# Altium PCB UTAT_data handling_v1.pc.PcbDoc (part 2 of 3)
Units mm, origin at the board's own origin, x right, y up, seen from the top; angles counter-clockwise.
Board outline 152.4 x 101.6 mm, 4 copper layers (Top Layer, +3V3, GND, Bottom Layer); 169 components, 207 nets, 755 pads, 446 vias.
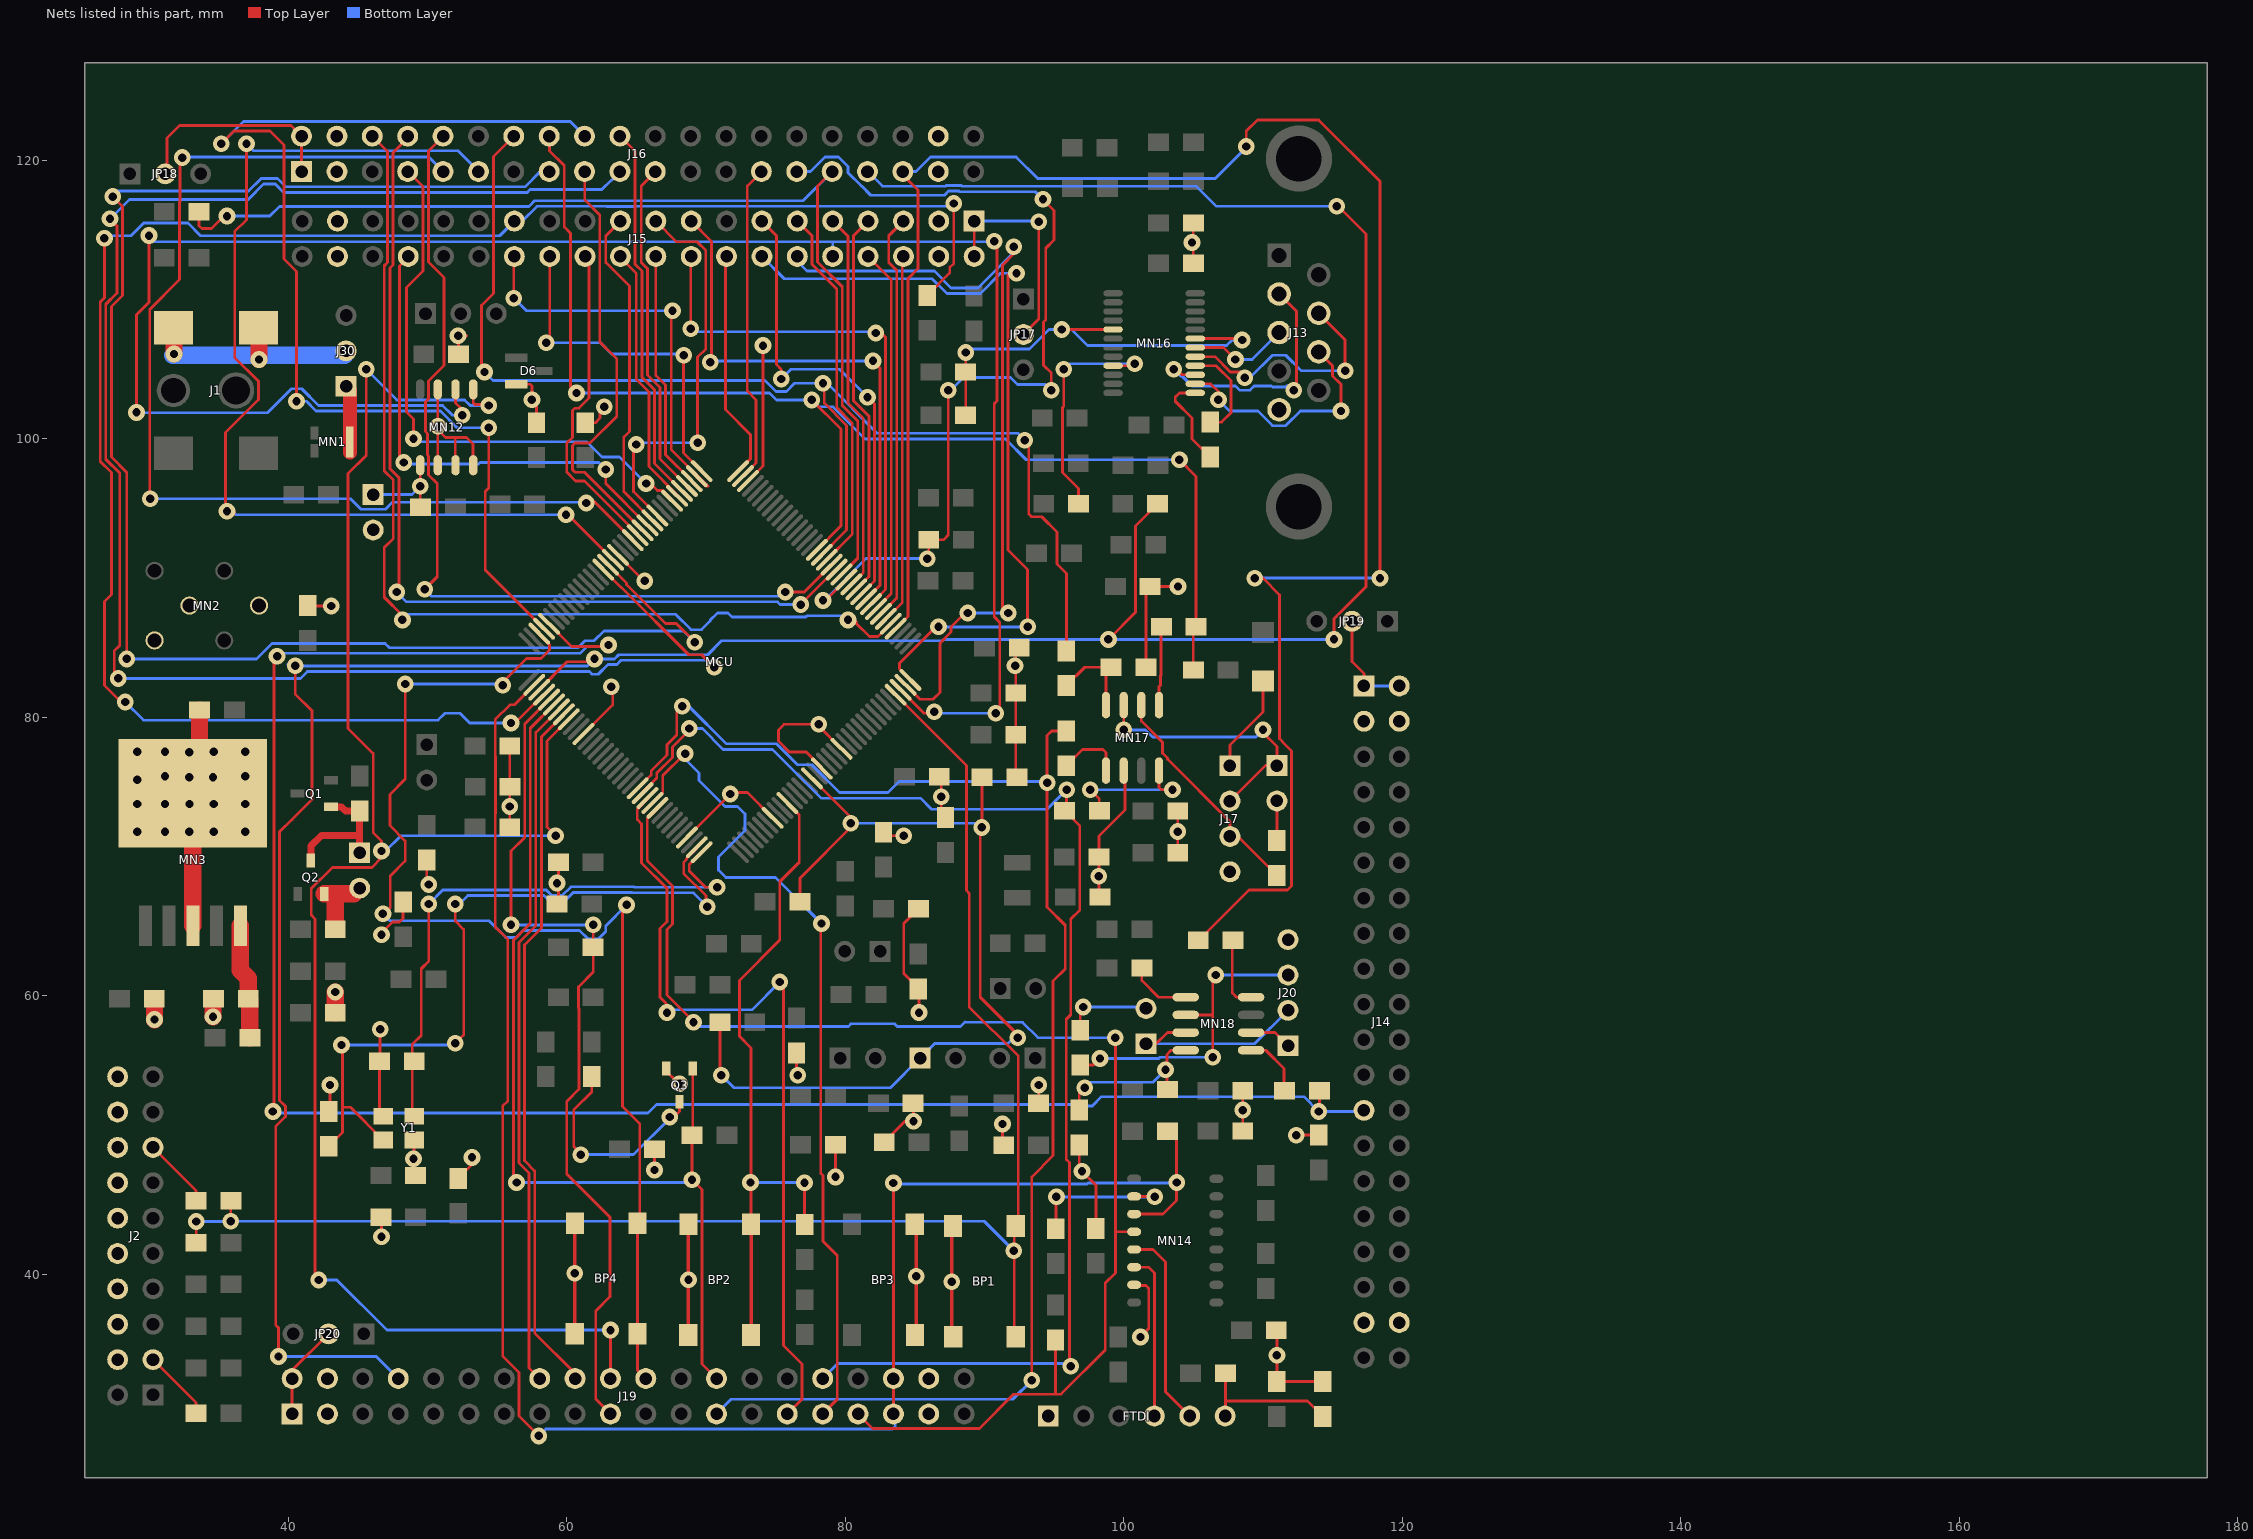
[diagram p4: the nets of this part, all layers, seen from the top]

## Via types
v1: diameter 1.2, hole 0.6, Top Layer to Bottom Layer, 446 vias

## Nets (pads, with @x,y where several pads share a name; then routed paths per layer and width w, separated by ;. In a path a pad name is that pad's centre, name@x,y a point inside that pad or via, vN(x,y) a via of type N, cw(c..) or ccw(c..) an arc to the next point about the centre after c; other vN are vias at no path point) (continued)
NetFTDI_4: FTDI.4 MN14.14 | length 11.9
  Top Layer w0.2: MN14.14@100.75,40.52 101.78,40.52 102.201,40.099 FTDI.4@102.201,29.83
NetFTDI_5: FTDI.5 MN14.13 | length 14.4
  Top Layer w0.2: MN14.13@100.75,41.79 102.11,41.79 103,40.9 103,31.571 FTDI.5@104.741,29.83
NetFTDI_6: FTDI.6 R205.1 R206.2 | length 10.5
  Top Layer w0.2: FTDI.6@107.281,29.83 107.3,29.849 107.3,30.9 ; R205.1@107.3,32.9 107.3,30.9 ; R206.2@114.3,29.8 113.2,30.9 107.3,30.9
NetJ1_1: J1.1 J30.2 | length 16.6
  Top Layer w1.25: J1.1@31.756,107.98 31.8,107.936 v1(31.8,106.1) ; J1.1@37.856,107.98 38,107.836 37.9,107.736 v1(37.9,105.7)
  Bottom Layer w1.25: v1@31.72,106.02 J30.2@44.056,106.02
NetJ13_2: J13.2 MN16.15 | length 18.7
  Top Layer w0.2: v1(103.6,105) 103.8,105 104.195,104.605 MN16.15@105.135,104.605 ; J13.2@111.16,110.405 112.4,109.165 112.4,103.7 v1(112.2,103.5)
  Bottom Layer w0.2: v1(103.6,105) 104.1,104.5 104.2,104.5 104.9,103.8 108.027,103.8 108.327,103.5 109.073,103.5 109.373,103.8 110.606,103.8 110.686,103.72 111.634,103.72 111.714,103.8 111.9,103.8 v1(112.2,103.5)
NetJ13_3: J13.3 MN16.18 | length 7.2
  Top Layer w0.2: MN16.18@105.135,106.555 107.165,106.555 v1(108.02,105.7)
  Bottom Layer w0.2: v1(108.02,105.7) 109.225,105.7 J13.3@111.16,107.635
NetJ13_7: J13.7 MN16.17 | length 17.5
  Top Layer w0.2: MN16.17@105.135,105.905 106.542,105.905 107.647,104.8 108.4,104.8 v1@108.6,104.6 ; J13.7@114,109.02 115.9,107.12 v1(115.9,104.9)
  Bottom Layer w0.2: v1(108.7,104.4) 109.076,104.4 110.686,106.01 111.634,106.01 112.744,104.9 v1(115.9,104.9) v1@116.2,104.9
NetJ13_8: J13.8 MN16.14 | length 18.2
  Top Layer w0.2: MN16.14@105.135,103.955 106.245,103.955 106.8,103.4 v1(106.8,102.8) ; J13.8@114,106.25 115,105.25 115,104.527 115.6,103.927 v1(115.6,102)
  Bottom Layer w0.2: v1(106.8,102.8) 107.6,102 109.636,102 110.686,100.95 111.634,100.95 112.684,102 v1(115.6,102) ; J13.8@114,105.5 J13.8@114,106.25
NetJ14_1: J14.1 J14.2 JP19.2 | length 7.5
  Top Layer w0.2: JP19.2@116.4,86.9 116.4,84 117.25,83.15 J14.1@117.25,82.26
  Bottom Layer w0.2: J14.1@117.25,82.26 J14.2@119.79,82.26
NetJ15_1: J15.1 J15.2 JP17.2 | length 15.8
  Top Layer w0.2: J15.2@89.26,113.1 J15.1@89.26,115.64 ; JP17.2@92.8,107.5 92.8,107.514 93.9,108.614 v1(93.9,115.6)
  Bottom Layer w0.2: J15.1@89.26,115.64 93.86,115.64 v1(93.9,115.6)
NetJ16_1: J16.1 J16.2 JP18.2 | length 15.9
  Top Layer w0.2: JP18.2@31.171,119.03 31.3,119.159 31.3,121.6 32.2,122.5 40.2,122.5 J16.2@40.96,121.74 J16.1@40.96,119.2
  Bottom Layer w0.2: J16.2@40.74,121.5 J16.2@40.98,121.74
NetJ17_2: J17.2 JP22.1 MN17.7 | length 19.9
  Top Layer w0.2: v1(99.996,79.104) MN17.7@99.996,80.88 ; J17.2@107.631,73.99 110.181,76.54 JP22.1@111,76.54 111,77.9 110,78.9 v1(110,79.104)
  Bottom Layer w0.2: v1(99.996,79.104) 100,79.1 101.573,79.1 102.073,78.6 109.496,78.6 v1(110,79.104) v1@110.296,79.104
NetJ17_3: J17.3 MN17.6 R128.2 | length 16.6
  Top Layer w0.2: MN17.6@101.266,80.88 101.266,79.734 102.785,78.215 102.785,77.43 103.136,77.079 103.136,77 107.631,72.505 J17.3@107.631,71.45 108.2,71.45 R128.2@111,68.65
NetJ19_1: J19.1 J19.2 JP20.2 | length 6.8
  Top Layer w0.2: J19.1@40.281,29.98 J19.2@40.281,32.52 40.281,33.12 JP20.2@42.891,35.73
NetJ20_2: J20.2 JP23.1 MN18.7 | length 14.4
  Top Layer w0.2: JP23.1@101.6,56.56 102.33,56.56 103.135,57.365 MN18.7@104.45,57.365
  Bottom Layer w0.2: JP23.1@101.6,56.56 109.4,56.56 J20.2@111.8,58.96
NetJ20_3: J20.3 MN18.6 R135.2 | length 22.9
  Top Layer w0.2: R135.2@96.881,55.03 97.83,55.03 v1(98.3,55.5) ; MN18.6@104.45,58.635 106.365,58.635 106.4,58.6 ; v1(106.4,55.6) 106.4,58.6 ; v1(106.6,61.5) 106.4,61.3 106.4,58.6
  Bottom Layer w0.2: v1(98.3,55.5) 102.527,55.5 102.627,55.6 v1(106.4,55.6) ; v1(106.6,61.5) J20.3@111.8,61.5
NetJ30_1: J30.1 MN1.1 | length 4.9
  Top Layer w1: J30.1@44.156,103.78 44.426,103.51 MN1.1@44.426,99.03
NetJP3_1: JP3.1 Q1.1 Q2.3 R4.1 | length 10
  Top Layer w0.5: Q2.3@41.631,69.73 41.631,70.78 42.381,71.53 45.131,71.53 ; Q1.1@43.081,73.58 43.831,73.58 44.131,73.28 R4.1@45.131,73.28 45.131,71.53 ; JP3.1@45.131,70.28 45.131,71.53
NetJP11_1: JP11.1 MN12.1 R83.1 | length 6.5
  Top Layer w0.2: MN12.1@49.476,98.105 v1(49.476,96.6) 49.476,95.435 R83.1@49.631,95.28
  Bottom Layer w0.2: JP11.1@46.1,96 48.876,96 v1(49.476,96.6)
NetJP22_2: JP22.2 R128.1 | length 2.8
  Top Layer w0.2: R128.1@111,71.15 JP22.2@111,74
NetJP23_2: JP23.2 R135.1 | length 5.9
  Top Layer w0.2: R135.1@96.881,57.53 96.881,58.881 v1@96.9,58.9
  Bottom Layer w0.2: v1(97.1,59.2) 101.5,59.2 JP23.2@101.6,59.1
NetMN3_5: MN3.5 R3.1 R6.2 | length 8.3
  Top Layer w1.25: MN3.5@36.56,65.03 36.56,61.851 37.131,61.28 R6.2@37.131,59.78 37.25,59.661 R3.1@37.25,57
NetMN14_10: MN14.10 R112.1 | length 10.9
  Top Layer w0.2: R112.1@95.131,43.28 95.131,45.531 v1(95.165,45.565) ; MN14.10@100.75,45.6 102.2,45.6 v1(102.235,45.565)
  Bottom Layer w0.2: v1(95.165,45.565) v1(102.235,45.565)
NetMN16_5: MN16.5 MN16.19 R119.2 RR7-4.2 | length 32.8
  Top Layer w0.2: R119.2@88.65,101.7 RR7-4.2@88.65,104.8 v1(88.65,106.2) ; v1(95.545,107.855) MN16.5@99.235,107.855 ; MN16.19@105.135,107.205 108.395,107.205 v1(108.5,107.1)
  Bottom Layer w0.2: v1(88.65,106.2) 88.9,106.45 93.235,106.45 94.64,107.855 v1(95.545,107.855) 96.252,107.855 97.407,106.7 107.393,106.7 107.793,107.1 v1(108.5,107.1)
NetMN16_9: MN16.9 RR7-1.2 | length 17.1
  Top Layer w0.2: v1(95.7,105) 95.7,102.349 95.6,102.249 95.6,97.589 96.757,96.432 RR7-1.2@96.757,95.33 ; MN16.9@99.235,105.255 100.655,105.255 v1(100.8,105.4)
  Bottom Layer w0.2: v1(95.7,105) 96.1,105.4 v1(100.8,105.4)
NetMN16_13: MN16.13 R124.2 | length 6.9
  Top Layer w0.2: MN16.13@105.135,103.305 104.005,103.305 103.7,103 103.7,102.7 104.9,101.5 104.9,100 R124.2@106.2,98.7
NetMN16_16: MN16.16 R124.1 | length 7.1
  Top Layer w0.2: MN16.16@105.135,105.255 106.627,105.255 107.7,104.182 107.7,101.873 107.027,101.2 R124.1@106.2,101.2
NetMN17_1: MN17.1 R127.2 | length 4.7
  Top Layer w0.2: R127.2@95.881,76.53 97.051,77.7 98.5,77.7 98.726,77.474 MN17.1@98.726,76.18
NetMN17_4: MN17.4 R130.2 | length 9.6
  Top Layer w0.2: v1@97.8,74.6 98.25,74.15 R130.2@98.25,73.3 ; MN17.4@102.536,76.18 102.536,74.964 102.7,74.8 v1(103.5,74.8)
  Bottom Layer w0.2: v1(97.6,74.8) v1(103.5,74.8)
NetMN17_5: MN17.5 R129.1 | length 6.1
  Top Layer w0.2: R129.1@102.381,86.78 102.681,86.48 102.681,83.031 102.65,83 102.65,82.314 102.536,82.2 MN17.5@102.536,80.88
NetMN17_8: MN17.8 R126.2 R131.2 | length 6.1
  Top Layer w0.2: R126.2@95.881,82.28 97.2,83.6 98.7,83.6 98.726,83.574 MN17.8@98.726,80.88
NetMN18_1: MN18.1 R133.2 | length 4.5
  Top Layer w0.2: MN18.1@109.15,56.095 110.2,56.095 111.5,54.795 111.5,53.25 R133.2@111.55,53.2
NetMN18_4: MN18.4 R137.2 | length 5.3
  Top Layer w0.2: R137.2@107.85,64 107.8,63.95 107.8,60.2 108.095,59.905 MN18.4@109.15,59.905
NetMN18_5: MN18.5 R136.1 | length 5
  Top Layer w0.2: R136.1@101.3,62.45 101.3,61.1 102.495,59.905 MN18.5@104.45,59.905
NetMN18_8: MN18.8 R134.2 R138.2 | length 13.6
  Top Layer w0.2: R138.2@96.8,51.8 96.8,53 v1(97.2,53.4) ; v1(103,54.7) v1@103.105,54.595 ; MN18.8@104.45,56.095 103.4,56.095 103.105,55.8 v1@103.105,54.595 ; v1@103.105,54.595 103.131,54.569 R134.2@103.131,53.28 103.105,53.306 v1@103.105,54.595
  Bottom Layer w0.2: v1(97.2,53.4) 97.6,53.8 102.1,53.8 102.8,54.5 v1@103.1,54.5
NetQ3_3: Q3.3 R13.1 | length 15.5
  Top Layer w0.2: v1(61,48.6) 61,48.7 60.5,49.2 60.5,51.8 61.8,53.1 R13.1@61.8,54.2 ; v1(67.4,51.3) 67.7,51.3 68.1,51.7 Q3.3@68.1,52.4
  Bottom Layer w0.2: v1(61,48.6) 64.8,48.6 67.4,51.2 v1(67.4,51.3)
NRST: BP1.3 BP1.4 MCU.69 R18.1 R24.1 | length 112.4
  Top Layer w0.2: R18.1@33.381,42.28 33.4,42.299 v1(33.4,43.8) ; v1(35.881,43.819) R24.1@35.881,45.28 ; MCU.69@83.622,81.631 88.7,76.553 88.7,67.573 88.9,67.373 88.9,59.206 92.431,55.675 92.431,43.656 BP1.4@92.25,43.475 ; v1(92.1,41.7) v1@92.144,41.7 ; BP1.3@92.144,35.495 v1@92.144,41.7 ; BP1.4@92.144,43.445 v1@92.144,41.7
  Bottom Layer w0.2: v1(33.4,43.8) 35.862,43.8 v1(35.881,43.819) 89.981,43.819 v1(92.1,41.7)
NRSTB: BP2.3 BP2.4 C22.2 MCU.47 | length 47.6
  Top Layer w0.2: BP2.4@73.259,43.58 BP2.4@73.244,43.595 73.244,56.256 72.4,57.1 72.4,61.101 75.3,64.001 75.3,68.199 76.7,69.599 76.7,72.997 MCU.47@75.844,73.853 ; C22.2@77.081,43.58 v1(77.081,46.581)
  Top Layer w0.25: BP2.3@73.244,35.645 BP2.4@73.244,43.595
  Bottom Layer w0.2: v1(73.2,46.6) 77.062,46.6 v1(77.081,46.581)
NSRST: J2.15 R24.2 | length 5.1
  Top Layer w0.2: J2.15@30.29,49.12 33.381,46.029 R24.2@33.381,45.28
NTRST: J2.3 R22.1 | length 5.1
  Top Layer w0.2: J2.3@30.29,33.88 33.381,30.789 R22.1@33.381,30.03
P1: C36.1 MCU.36 Y1.1 | length 41.6
  Top Layer w0.2: Y1.1@49.034,51.353 48.9,51.487 48.9,56.5 49.55,57.15 49.55,61.949 50.1,62.499 v1(50.1,66.6) ; MCU.36@69.692,70.317 68.8,69.426 68.8,68.962 69.962,67.8 v1(70.8,67.8)
  Bottom Layer w0.2: v1(50.1,66.6) 51.1,67.6 58.527,67.6 58.927,67.2 59.673,67.2 60.305,67.832 64.838,67.832 64.871,67.8 v1(70.8,67.8)
P2: C33.1 MCU.35 Y1.3 | length 54.9
  Top Layer w0.2: C33.1@42.9,49.2 43.9,50.2 43.9,52 ; v1(43.825,56.475) 43.9,56.4 43.9,52 ; Y1.3@46.834,49.653 46.81,49.653 44.463,52 43.9,52 ; v1(52,56.6) 52.6,57.2 52.6,64.773 52,65.373 v1(52,66.6) ; MCU.35@69.338,70.671 69.338,70.6 68.605,69.867 68.605,69.797 68.4,69.591 68.4,68.796 70,67.196 70,66.5 v1(70.1,66.4)
  Bottom Layer w0.2: v1(43.825,56.475) v1@52,56.475 ; v1(52,66.6) 52.3,66.6 52.9,67.2 58.362,67.2 58.762,66.8 59.838,66.8 60.471,67.432 64.673,67.432 64.705,67.4 69.1,67.4 v1(70.1,66.4)
P7: BP1.1 BP1.2 BP2.1 BP2.2 BP3.1 BP3.2 BP4.1 BP4.2 C2.2 C3.2 C4.2 C5.2 C7.2 C8.2 C9.2 C10.2 C11.2 C12.2 C13.2 C14.2 C15.2 C16.2 C17.2 C18.2 C19.2 C25.2 C26.2 C27.2 C28.2 C29.2 C33.2 C34.2 C35.2 C36.2 C37.2 C38.2 C40.2 C41.2 C42.2 C43.2 C45.2 C47.2 C48.2 C100.2 C119.2 C121.2 C124.2 C125.2 C126.2 C132.2 C133.2 C134.2 C135.2 C200.1 D6.2 FTDI.1 J2.4 J2.6 J2.8 J2.10 J2.12 J2.14 J2.16 J2.18 J2.20 J13.5 J14.3 J14.4 J14.37 J14.38 J15.3 J15.4 J15.37 J15.38 J16.3 J16.4 J16.37 J16.38 J17.1 J17.4 J19.3 J19.4 J19.37 J19.38 J20.1 J20.4 JP3.2 JP11.2 MCU.12 MCU.33 MCU.44 MCU.54 MCU.58 MCU.106 MCU.126 MN2.4 MN2.5 MN2.6 MN3.3 MN3.6 MN12.2 MN12.3 MN12.4 MN12.7 MN14.15 MN17.2 MN18.2 Q2.2 Q3.2 R5.1 R6.1 R28.1 R29.1 R131.1 R138.1 R204.1 R206.1 Y1.2 Y1.4 | length 236.8
  Top Layer w0.2: C2.2@41.406,88.03 41.436,88 v1(43.1,88) ; C33.2@42.9,51.7 43,51.8 v1(43,53.6) ; v1(46.6,57.6) 46.6,55.35 C36.2@46.55,55.3 46.55,51.637 Y1.2@46.834,51.353 ; R28.1@46.65,44.1 46.7,44.05 v1(46.7,42.7) ; v1(46.7,64.4) 46.7,64.499 47.501,65.3 48,65.3 48.25,65.55 C19.2@48.25,66.75 ; Y1.4@49.034,49.653 49.034,47.216 C8.2@49.15,47.1 ; C17.2@49.95,69.75 49.95,68.15 v1(50.1,68) ; MN12.2@50.746,98.105 MN12.7@50.746,103.555 ; v1(50.755,100.9) 50.755,100.646 51.301,100.1 52,100.1 ; MN12.3@52.001,98.055 52.001,99.4 52,99.401 52,100.1 ; v1(52.2,107.4) 52.8,107.4 52.231,106.831 C100.2@52.231,106.08 ; C26.2@52.209,46.888 53.2,47.879 v1(53.2,48.4) ; MN12.4@53.271,98.055 53.271,99.629 52.8,100.1 52,100.1 ; C29.2@55.913,72.105 C27.2@55.913,77.947 ; D6.2@56.381,103.93 57.37,103.93 57.5,103.8 v1(57.5,102.811) 57.831,102.48 C16.2@57.831,101.155 C16.2@57.986,101 ; C41.2@59.4,69.6 59.4,66.65 C25.2@59.45,66.6 ; C47.2@61.176,101 C47.2@61.331,101.155 62.055,101.155 62.4,101.5 62.4,102.3 v1(62.7,102.3) ; MCU.12@61.207,78.803 63.3,80.896 63.3,82.1 v1(63.2,82.2) ; MCU.126@63.681,91.672 65.554,89.8 v1(65.6,89.8) ; v1(66.3,47.5) C48.2@66.3,49 ; Q3.2@67.15,54.8 67.2,54.75 67.1,54.65 v1@67.9,53.85 ; v1@67.9,53.85 68.049,53.7 v1(68.1,53.7) ; MCU.33@68.631,71.378 v1(71.753,74.5) 71.753,74.447 71.906,74.6 72.975,74.6 MCU.44@74.783,72.792 ; MCU.106@73.015,96.975 74.1,98.06 74.1,99.327 v1(74.1,106.7) ; C4.2@76.5,55.9 76.5,54.4 v1(76.6,54.3) ; MCU.54@78.319,76.328 78.248,76.328 78.248,76.469 77.199,77.518 75.982,77.518 75.2,78.3 75.2,79.1 75.6,79.5 v1(78.1,79.5) 78.1,79.375 MCU.58@79.733,77.742 ; v1(79.3,47) C7.2@79.3,49.3 ; C18.2@82.7,71.8 C18.2@82.75,71.75 83,71.5 v1(84.2,71.5) ; C5.2@82.9,49.4 C5.2@82.8,49.5 84.3,51 v1(84.9,51) 84.9,52.261 C12.2@84.881,52.28 ; C15.2@85.25,66.25 84.2,65.2 84.2,61.6 85.25,60.55 C9.2@85.25,60.5 85.3,60.45 v1(85.3,58.8) ; C38.2@86.75,75.75 86.891,75.609 C43.2@86.891,72.644 ; v1(91.3,50.8) 91.3,49.361 C3.2@91.381,49.28 ; C34.2@92.25,85 C35.2@92.25,81.75 C37.2@92.25,78.75 92.25,75.382 C45.2@92.332,75.3 ; C14.2@93.881,52.28 93.9,52.299 v1(93.9,53.6) ; R138.1@96.8,49.3 96.8,47.6 v1(97,47.4) 98,46.4 C121.2@98,43.3 ; C40.2@98.3,67.1 98.231,67.169 C42.2@98.231,69.972 98.231,71.482 100.1,73.351 100.1,76.076 MN17.2@99.996,76.18 ; MN14.15@100.75,39.25 100.8,39.2 101.6,39.2 101.801,38.999 101.801,36.101 v1(101.2,35.5) ; R131.1@101.6,83.6 101.6,89.1 R29.1@101.9,89.4 v1(103.9,89.4) ; C133.2@103.881,70.28 C132.2@103.881,73.28 ; C125.2@105,112.6 C126.2@105,115.5 ; J17.1@107.631,76.53 107.631,78.008 110,80.377 C200.1@110,82.6 ; C135.2@108.55,50.3 C134.2@108.55,53.2 ; MN18.2@109.15,57.365 110.855,57.365 J20.1@111.8,56.42 ; C119.2@110.95,36 111,35.95 v1(111,34.2) R204.1@111,32.3 R206.1@114.3,32.3 ; v1(112.4,50) C124.2@114,50
  Top Layer w0.25: BP4.1@60.581,35.73 BP4.2@60.581,43.68 ; BP2.1@68.744,35.645 v1(68.744,39.62) BP2.2@68.744,43.595 ; BP3.2@85.098,35.27 BP3.1@85.098,43.22 ; BP1.1@87.644,35.495 v1(87.644,39.47) BP1.2@87.644,43.445
  Top Layer w1.25: C11.2@30.381,59.78 30.4,59.761 v1(30.4,58.3) ; MN3.3@33.156,65.03 MN3.6@33.156,73.78 ; MN3.6@33.156,74.555 33.631,75.03 R5.1@33.631,80.53 ; v1(34.6,58.5) 34.6,59.749 R6.1@34.631,59.78 ; Q2.2@42.581,67.33 43.381,67.33 ; C10.2@43.381,58.78 v1(43.381,60.28) ; C13.2@43.381,64.78 43.381,67.33 ; JP3.2@45.131,67.74 44.721,67.33 43.381,67.33
  other v1: 85.098,39.87 60.581,40.08 49,48.3 108.55,51.8 59.3,68.1 98.2,68.6 29.156,71.78 31.156,71.78 34.656,71.78 36.906,71.78 32.9,71.8 103.881,71.8 55.9,73.6 29.156,73.78 31.156,73.78 32.906,73.78 34.656,73.78 36.906,73.78 86.891,74.3 29.156,75.53 32.9,75.7 34.6,75.7 31.156,75.78 36.906,75.78 32.9,77.5 29.156,77.53 31.156,77.53 34.656,77.53 36.906,77.53 92.2,83.7 104.9,114.1
P8: C45.1 JP1-4.1 MCU.52 R139.1 R140.1 | length 67.5
  Top Layer w0.2: R140.1@71,58.1 71,54.4 v1(71.1,54.3) ; R139.1@76.75,66.75 76.75,68.45 80.6,72.3 80.6,72.632 MCU.52@77.611,75.621 ; v1(89.8,72.1) 89.7,72 89.7,59.9 v1@92.1,57.5 ; v1@89.832,72.1 C45.1@89.832,75.692
  Bottom Layer w0.2: v1(71.1,54.3) 72,53.4 83.251,53.4 JP1-4.1@85.381,55.53 86.431,56.58 91.68,56.58 92.1,57 v1(92.4,57) ; v1(80.4,72.4) 89.5,72.4 v1(89.8,72.1)
PA0: J19.25 MCU.23 R127.1 | length 109.5
  Top Layer w0.2: MCU.23@65.096,74.914 65.118,74.914 66.065,75.861 66.065,76.161 67.2,77.296 67.2,78.038 67.9,78.738 67.9,80.4 v1(68.3,80.8) ; v1(93.4,32.4) 93.4,47 94.931,48.531 94.931,61.058 95.8,61.927 95.8,65.073 94.5,66.373 94.5,78.7 94.83,79.03 R127.1@95.881,79.03
  Bottom Layer w0.2: v1(68.3,80.8) 68.766,80.8 71.466,78.1 74.048,78.1 75.08,78.1 76.58,76.6 77.6,76.6 79.6,74.6 83.073,74.6 83.873,75.4 v1@94.7,75.4 ; J19.25@70.761,29.98 71.811,31.03 92.03,31.03 v1(93.4,32.4)
  other v1: 94.5,75.3
PA1: J19.32 MCU.24 R130.1 | length 96.9
  Top Layer w0.2: MCU.24@65.449,74.56 65.52,74.56 65.52,74.702 66.465,75.647 66.465,75.995 67.6,77.13 67.6,77.873 68.927,79.2 v1(68.8,79.2) ; v1(95.9,74.8) 95.9,73.45 R130.1@95.75,73.3 96.85,72.2 96.85,66.175 96.2,65.525 96.2,58.648 95.875,58.323 95.875,48.25 96.1,48.025 v1@96.1,33.4
  Bottom Layer w0.2: v1(68.8,79.2) 69.738,79.2 71.2,77.738 71.2,77.73 71.23,77.7 74.773,77.7 78.273,74.2 85.4,74.2 86.2,73.4 94.5,73.4 v1(95.9,74.8) ; J19.32@78.381,32.52 79.461,33.6 v1@96.1,33.6
  other v1: 96.2,33.4
PA2: J15.9 MCU.85 | length 27.4
  Top Layer w0.2: J15.9@79.1,115.64 80.19,114.55 80.19,102.572 81.3,101.462 81.3,90.411 MCU.85@80.44,89.551
PA3: J15.7 MCU.84 | length 27.7
  Top Layer w0.2: MCU.84@80.793,89.197 81.7,90.104 81.7,101.627 80.59,102.737 80.59,114.59 J15.7@81.64,115.64
PA4: J15.13 MCU.83 | length 34
  Top Layer w0.2: J15.13@74.02,115.64 75.07,114.59 75.07,105.334 75.4,105.004 v1(75.4,104.3) ; MCU.83@81.147,88.844 82.1,89.797 82.1,102.5 v1(81.6,103)
  Bottom Layer w0.2: v1(75.4,104.3) 76.1,105 79.6,105 v1(81.6,103)
PA5: J19.29 MCU.25 | length 58.6
  Top Layer w0.2: MCU.25@65.803,74.207 65.803,74.136 65.07,73.403 65.07,72.662 65.377,72.355 65.377,69.556 67.2,67.734 67.2,65.331 66.7,64.831 66.7,59.9 67.6,59 67.4,58.8 v1(67.2,58.8) ; v1(75.3,61) 75.575,60.725 75.575,34.886 76.891,33.57 76.891,31.03 J19.29@75.841,29.98
  Bottom Layer w0.2: v1(67.2,58.8) 67.3,58.8 67.5,59 73.3,59 v1(75.3,61)
PA6: J15.17 MCU.82 | length 40.3
  Top Layer w0.2: J15.17@68.94,115.64 70.4,114.18 70.4,105.6 v1(70.3,105.5) ; MCU.82@81.501,88.49 82.5,89.49 82.5,105.1 v1(82,105.6)
  Bottom Layer w0.2: v1(70.3,105.5) 70.4,105.6 v1(82,105.6)
PA7: J19.31 MCU.26 | length 61.3
  Top Layer w0.2: MCU.26@66.156,73.853 66.889,74.586 66.889,75.811 68.378,77.3 v1@68.4,77.3 ; v1(78.3,65.2) 78.25,65.15 78.25,47.25 78.4,47.1 78.4,46.627 78.406,46.621 78.406,42.384 79.431,41.359 79.431,31.03 J19.31@78.381,29.98
  Bottom Layer w0.2: v1(68.5,77.4) 68.5,77 69.5,76 69.5,75.48 71.38,73.6 72.273,73.6 72.8,73.073 72.8,71.873 70.9,69.973 70.9,69.027 71.427,68.5 72.173,68.5 75,68.5 78.1,65.4 v1@78.7,65.4
PA8: J19.33 MCU.27 MN14.12 R200.1 | length 97.1
  Top Layer w0.2: MCU.27@66.51,73.499 66.51,73.429 65.777,72.696 65.777,69.722 67.6,67.899 67.6,65.165 67.2,64.765 67.2,64 67.2,60.073 69.1,58.173 v1(69.1,58.1) ; J19.33@80.921,29.98 81.971,28.93 89.63,28.93 92.1,31.4 95.1,31.4 ; R200.1@95.1,35.3 95.1,31.4 ; v1(99.4,57) 99.4,43.06 ; MN14.12@100.75,43.06 99.4,43.06 ; 95.1,31.4 95.5,31.4 98.675,34.575 98.675,39.375 99.4,40.1 99.4,43.06
  Bottom Layer w0.2: v1(69.1,58.1) 69.4,57.8 80.227,57.8 80.427,58 83.533,58 83.733,57.8 88.273,57.8 88.6,58.127 88.627,58.1 92.734,58.1 93.834,57 v1(99.4,57)
PA9: J19.35 J19.36 MCU.2 MN14.11 R111.1 | length 129.4
  Top Layer w0.2: MCU.2@57.671,82.338 56.233,80.9 55.927,80.9 54.863,79.836 54.863,77.198 54.883,77.178 54.883,73.12 54.863,73.1 54.863,64.964 55.771,64.056 55.771,52.462 55.4,52.091 55.4,34.126 56.571,32.955 56.571,29.829 v1(58,28.4) ; J19.35@83.461,29.98 J19.36@83.461,32.52 v1(83.461,46.561) ; MN14.11@100.75,44.33 102.83,44.33 103.8,45.3 v1(103.8,46.6) 103.8,49.611 R111.1@103.131,50.28
  Bottom Layer w0.2: v1(58,28.4) 58.5,28.9 83.4,28.9 83.6,29.1 83.6,29.841 J19.35@83.461,29.98 ; v1(83.461,46.561) 83.522,46.5 97.373,46.5 97.434,46.561 103.761,46.561 v1(103.8,46.6)
PA10: J16.33 J19.8 MCU.3 R121.1 | length 219.9
  Top Layer w0.2: v1(39.301,34.101) 39.301,36.165 39.1,36.366 39.1,50.627 39.8,51.327 39.8,52.073 39.375,52.498 39.375,71.786 40.264,72.675 40.283,72.675 41.7,74.092 41.7,80.473 40.5,81.673 v1(40.5,83.7) ; MCU.3@58.025,81.985 60.04,84 v1@62,84 ; v1(98.9,85.6) 100.85,87.55 100.85,92.85 100.85,93.748 R121.1@102.432,95.33 ; v1(115.1,85.6) 115.1,87.085 117.4,89.385 117.4,114.72 v1@115.36,116.76
  Bottom Layer w0.2: v1(39.301,34.101) 46.32,34.101 J19.8@47.901,32.52 ; v1@39.973,83.8 v1@40.5,83.8 ; v1(40.5,83.7) 61.5,83.7 v1(62,84.2) ; 62.6,84.2 63.434,84.2 63.734,84.5 70.127,84.5 71.127,85.5 86.973,85.5 87.073,85.6 88.473,85.6 ; J16.33@81.62,119.2 82.67,118.15 87.212,118.15 87.261,118.2 88.338,118.2 88.388,118.15 105.2,118.15 106.65,116.7 v1(115.3,116.7) ; 88.473,85.6 v1(98.9,85.6) v1(115.1,85.6)
PA11: J15.27 MCU.4 R120.1 | length 136.6
  Top Layer w0.2: v1(26.8,114.4) 26.8,110.131 26.5,109.831 26.5,98.373 27.3,97.573 27.3,88.827 26.8,88.327 26.8,82.3 v1@28.1,81 ; v1(56,79.6) 56.3,79.6 58.331,81.631 MCU.4@58.378,81.631 ; R120.1@85.9,110.3 87.5,111.9 87.5,112.3 87.8,112.6 v1@87.8,116.9
  Bottom Layer w0.2: v1@26.89,114.59 28.717,114.59 29.627,115.5 32.8,115.5 33.71,114.59 55.19,114.59 J15.27@56.24,115.64 56.806,115.64 57.866,116.7 62.869,116.7 62.879,116.69 64.841,116.69 64.851,116.7 87.3,116.7 87.5,116.9 v1(87.8,116.9) ; v1(28.3,81.1) 29.6,79.8 50.762,79.8 51.262,80.3 52.338,80.3 53.039,79.6 v1(56,79.6)
PA12: J19.19 MCU.5 R10.1 | length 61.5
  Top Layer w0.2: v1(56,65.1) 56.007,65.107 56.007,70.4 56.983,71.376 56.983,79.529 MCU.5@58.732,81.278 ; v1(61.9,65.1) R10.1@61.9,63.5 61.9,61.699 60.85,60.649 60.85,59.126 60.875,59.101 60.875,53.301 60,52.426 60,47.2 63.1,44.1 63.1,38.4 62.091,37.391 62.091,31.03 J19.19@63.141,29.98
  Bottom Layer w0.2: v1(56,65.1) 61.6,65.1 61.8,64.9 61.9,65 v1(61.9,65.1)
PA13: J19.26 MCU.6 Q3.1 R14.1 | length 71.5
  Top Layer w0.2: v1(56.4,46.6) 56.4,46.9 56.171,47.129 56.171,63.998 57.383,65.21 57.383,79.222 MCU.6@59.085,80.924 ; Q3.1@69,54.8 69,54.85 Q3.1@69.05,54.8 69.05,50.05 R14.1@69,50 v1(69,46.8) 69.709,46.091 69.709,33.572 J19.26@70.761,32.52
  Bottom Layer w0.2: v1(56.4,46.6) 68.8,46.6 v1(69,46.8)
PA14: J19.16 MCU.7 | length 49.9
  Top Layer w0.2: J19.16@58.061,32.52 57.3,33.281 57.3,47.273 56.571,48.002 56.571,63.833 57.783,65.045 57.783,78.915 MCU.7@59.439,80.571
PA15: J19.18 MCU.8 | length 50.4
  Top Layer w0.2: MCU.8@59.792,80.217 58.183,78.608 58.183,64.879 56.971,63.667 56.971,48.167 57.7,47.438 57.7,35.8 60.601,32.899 J19.18@60.601,32.52
PA16: J15.6 MCU.78 | length 26.5
  Top Layer w0.2: MCU.78@82.915,87.076 84.1,88.261 84.1,113.02 J15.6@84.18,113.1
PA17: J19.20 MCU.9 MN12.5 | length 130.3
  Top Layer w0.2: v1@41.931,39.6 41.931,65.529 41.656,65.804 41.656,67.713 43.173,69.23 46.005,69.23 46.7,69.925 v1(46.7,70.4) 46.7,71.13 46.1,71.73 46.1,77.407 44.3,79.207 44.3,97.505 45.6,98.805 v1(45.6,105) ; MN12.5@53.286,103.555 53.286,102.587 53.4,102.473 54.327,102.473 v1(54.4,102.4) ; v1(59.2,71.5) 58.583,72.117 58.583,78.301 MCU.9@60.146,79.863 ; J19.20@63.141,32.52 v1(63.141,36)
  Bottom Layer w0.2: v1(42.2,39.6) 43.485,39.6 47.085,36 v1(63.141,36) ; 46.05,104.55 47.3,103.3 47.8,102.8 52.673,102.8 53.073,102.4 v1(54.4,102.4) ; v1(46.7,70.4) 47,70.4 48.1,71.5 v1(59.2,71.5)
PA18: J15.10 MCU.70 MN12.6 | length 143.7
  Top Layer w0.2: v1(29.1,101.9) 29.1,108.914 30,109.814 v1(30,114.6) ; MN12.6@52.016,103.555 52.016,102.584 52.5,102.1 v1(52.5,101.7) ; MCU.70@83.975,81.985 85.66,80.3 v1@86.2,80.3 ; v1(90.7,114.2) 90.7,114 90.9,113.8 90.9,102.727 90.7,102.527 90.7,87.227 91.1,86.827 91.1,80.6 v1(90.8,80.3)
  Bottom Layer w0.2: v1@29.1,101.88 38.507,101.88 40.227,103.6 40.973,103.6 42.173,102.4 51.093,102.4 51.793,101.7 v1(52.5,101.7) ; v1(30,114.6) 30.45,114.15 79.1,114.15 ; J15.10@79.1,113.1 79.1,114.15 ; v1(86.4,80.4) 86.5,80.3 v1(90.8,80.3) ; v1(90.7,114.2) 90.65,114.15 79.1,114.15
PA19: J15.12 MCU.71 | length 57.2
  Top Layer w0.2: MCU.71@84.329,82.338 85.367,81.3 86.3,81.3 86.8,81.8 86.8,85.327 87.6,86.127 87.6,86.5 88.6,87.5 v1(88.8,87.5) ; v1(91.7,87.5) 91.3,87.9 91.3,102.562 91.3,112.473 92.2,113.373 92.1,113.473 v1(92.1,113.8)
  Bottom Layer w0.2: J15.12@76.56,113.1 76.56,112.74 77.25,112.05 86.4,112.05 87.61,110.84 89.54,110.84 92,113.3 v1@92,113.4 ; v1(88.8,87.5) v1(91.7,87.5)
PA20: J15.14 MCU.72 | length 57.7
  Top Layer w0.2: MCU.72@84.683,82.692 83.9,83.474 83.9,83.889 v1@86.605,86.595 ; v1@91.75,111.85 91.7,111.8 91.7,92.024 93.1,90.624 v1(93.1,86.5)
  Bottom Layer w0.2: J15.14@74.02,113.1 75.62,111.5 86.24,111.5 87.3,110.44 89.706,110.44 91.166,111.9 v1(92.3,111.9) ; v1(86.7,86.5) v1(93.1,86.5)
PA21: J16.27 MCU.107 | length 22.9
  Top Layer w0.2: MCU.107@72.662,97.329 73.6,98.267 73.6,102.8 72.97,103.43 72.97,118.17 J16.27@74,119.2
PA22: J15.18 MCU.81 | length 39.3
  Top Layer w0.2: v1(68.9,107.9) 68.9,112.94 69,113.04 J15.18@68.94,113.1 ; MCU.81@81.854,88.137 82.9,89.182 82.9,107.3 82.6,107.6 v1(82.2,107.6)
  Bottom Layer w0.2: v1(68.9,107.9) 69.1,107.7 82.3,107.7 v1(82.2,107.6)
PA23: J15.8 MCU.80 | length 26.5
  Top Layer w0.2: J15.8@81.64,113.1 83.3,111.44 83.3,88.875 MCU.80@82.208,87.783
PA24: J15.5 MCU.79 | length 29.4
  Top Layer w0.2: MCU.79@82.561,87.429 83.7,88.568 83.7,112.095 83.13,112.665 83.13,114.59 J15.5@84.18,115.64
PA25: J15.16 MCU.108 | length 16.6
  Top Layer w0.2: J15.16@71.48,113.1 71.4,113.02 71.4,102.1 73.2,100.3 73.2,98.574 MCU.108@72.308,97.683
PA26: J15.26 MCU.109 | length 25.4
  Top Layer w0.2: v1(58.527,106.9) 58.78,107.153 J15.26@58.78,113.1 ; v1(68.4,106) 68.387,105.987 68.387,98.987 MCU.109@69.692,97.683
  Bottom Layer w0.2: v1(58.527,106.9) 62.427,106.9 63.227,106.1 68.3,106.1 v1(68.4,106)
PA27: J15.28 MCU.110 | length 29.7
  Top Layer w0.2: v1(56.2,110.1) 56.2,113.06 J15.28@56.24,113.1 ; 67.5,105.627 67.5,106.373 ; 67.5,105.627 67.5,99.238 70.142,96.596 70,96.596 69.338,97.258 MCU.110@69.338,97.329 ; 67.5,106.373 67.5,109.1 v1(67.6,109.2)
  Bottom Layer w0.2: v1(56.2,110.1) 57.1,109.2 v1(67.6,109.2)
PA28: J15.20 MCU.111 | length 17.2
  Top Layer w0.2: J15.20@66.4,113.1 66.4,104.561 67.1,103.861 67.1,98.86 MCU.111@68.985,96.975
PA29: J16.21 MCU.112 | length 24.4
  Top Layer w0.2: J16.21@66.38,119.2 65.35,118.17 65.35,112.665 65.8,112.215 65.8,104.595 66.7,103.695 66.7,98.553 MCU.112@68.631,96.622
PB0: J16.20 MCU.113 | length 27.3
  Top Layer w0.2: J16.20@63.84,121.74 64.91,120.67 64.91,112.539 65.4,112.049 65.4,104.43 66.3,103.53 66.3,98.246 MCU.113@68.278,96.268
PB1: J15.22 MCU.114 | length 18.9
  Top Layer w0.2: J15.22@63.86,113.1 63.86,113.024 65,111.884 65,104.264 65.9,103.364 65.9,98.01 67.924,95.985 MCU.114@67.924,95.915
PB2: J16.7 MCU.115 | length 40.8
  Top Layer w0.2: J16.7@48.6,119.2 49.67,118.13 49.67,112.05 48.5,110.88 48.5,101.936 49,101.436 v1(49,100) ; v1@65.8,97 66.506,96.294 66.908,96.294 67.5,95.703 67.5,95.561 MCU.115@67.571,95.561
  Bottom Layer w0.2: v1(49,100) 49.2,99.8 61.427,99.8 62.527,98.7 63.8,98.7 v1(65.7,96.8)
PB3: J15.19 MCU.118 | length 29
  Top Layer w0.2: v1(65,99.6) 64.8,99.4 64.8,96.21 MCU.118@66.51,94.501 ; J15.19@66.4,115.64 67.89,114.15 69.375,114.15 69.99,113.535 69.99,106.463 69.4,105.873 v1(69.4,99.727)
  Bottom Layer w0.2: v1@64.827,99.727 v1(69.4,99.727)
PB4: J15.21 MCU.119 | length 23.6
  Top Layer w0.2: J15.21@63.86,115.64 62.81,114.59 62.81,112.665 64.5,110.975 64.5,100.534 64.1,100.134 64.1,96.203 MCU.119@66.156,94.147
PB5: J15.34 MCU.120 | length 35.2
  Top Layer w0.2: v1(48.3,98.3) 48,98.6 48,112.404 48.62,113.024 J15.34@48.62,113.1 ; v1(62.8,97.8) 62.8,96.796 MCU.120@65.803,93.793
  Bottom Layer w0.2: v1(48.3,98.3) 48.4,98.2 53.673,98.2 53.773,98.3 62.3,98.3 v1(62.8,97.8)
PB6: J16.17 MCU.121 | length 31.2
  Top Layer w0.2: J16.17@61.3,119.2 61.3,117.145 62.37,116.075 62.37,106.957 63.6,105.727 63.6,101.625 61.68,99.705 60.582,99.705 60.406,99.529 60.406,97.781 60.582,97.605 61.284,97.605 MCU.121@65.449,93.44
PB7: J15.24 MCU.122 | length 23.4
  Top Layer w0.2: J15.24@61.32,113.1 61.6,112.82 61.6,102.927 60.878,102.205 60.582,102.205 60.406,102.029 60.406,100.281 60.416,100.271 60.416,100.105 60.006,99.695 60.006,97.615 60.636,96.985 61.268,96.985 65.096,93.157 MCU.122@65.096,93.086
PB8: J16.9 MCU.123 | length 81.1
  Top Layer w0.2: v1(30.1,95.7) 30.056,95.744 30.056,109.304 32.2,111.448 32.2,117 32.221,117.021 32.221,120.021 v1(32.4,120.2) ; v1(61.4,95.4) 61.875,95.4 61.975,95.5 MCU.123@64.742,92.733
  Bottom Layer w0.2: v1(30.1,95.7) 44.476,95.7 45.226,94.95 46.974,94.95 47.524,95.5 47.574,95.45 61.35,95.45 v1(61.4,95.4) ; v1(32.4,120.2) 32.45,120.25 50.09,120.25 J16.9@51.14,119.2
PB9: J16.11 MCU.127 | length 75.6
  Top Layer w0.2: v1@36.1,94.6 36.1,94.8 35.5,95.4 35.5,100.461 37.856,102.817 37.856,104.143 36.156,105.843 36.156,114.883 37,115.727 v1(37,121.2) ; v1(59.95,94.55) 60.096,94.55 MCU.127@63.328,91.319
  Bottom Layer w0.2: v1(35.6,94.8) 36,94.8 36.25,94.55 v1(59.95,94.55) ; v1(37,121.2) 37.51,120.69 52.19,120.69 J16.11@53.68,119.2
PB10: J16.15 MCU.128 | length 117.7
  Top Layer w0.2: v1(27.4,117.4) 28.1,116.7 28.1,110.3 27.3,109.5 27.3,98.704 28.4,97.604 28.4,96.2 v1(28.4,84.2) ; MCU.128@62.974,90.965 64.3,89.639 64.3,89.533 67.1,86.733 67.867,86.733 v1(69.2,85.4)
  Bottom Layer w0.2: v1(27.4,117.4) 27.8,117.8 37.162,117.8 38.062,118.7 39.231,118.7 39.831,118.1 57.003,118.1 58.103,119.2 J16.15@58.74,119.2 J16.15@58.76,119.2 ; v1(28.4,84.2) 37.727,84.2 38.827,85.3 46.961,85.3 47.261,85 60.8,85 61.3,85.5 61.973,85.5 62.673,86.2 68.4,86.2 v1(69.2,85.4)
PB11: J16.19 MCU.129 | length 127.3
  Top Layer w0.2: v1@26.9,116.1 27.7,115.3 27.7,110.466 26.9,109.666 26.9,98.538 27.9,97.538 27.9,85.173 27.5,84.773 v1@27.5,83.2 ; MCU.129@62.621,90.611 63.9,89.332 63.935,89.332 68.767,84.5 69.7,84.5 v1(70.6,83.6)
  Bottom Layer w0.2: v1(27.2,115.8) 28.6,117.2 37.127,117.2 38.227,118.3 39.066,118.3 39.666,117.7 57.169,117.7 57.369,117.9 62.518,117.9 63.218,118.6 63.24,118.6 J16.19@63.84,119.2 ; v1(27.8,82.8) 40.873,82.8 41.373,83.3 61.627,83.3 61.827,83.1 62.261,83.1 62.962,83.8 63.6,83.8 63.9,84.1 70.1,84.1 v1(70.6,83.6)
PB12: J16.29 MCU.86 R11.1 | length 66.7
  Top Layer w0.2: v1(78.4,88.4) 78.582,88.4 MCU.86@80.086,89.904 ; v1@86,91.6 R11.1@86,92.75 87.05,92.75 87.4,93.1 v1(87.4,103.5) ; v1(94.2,117.2) 95,116.4 95,114.293 94.4,113.693 94.4,108.548 94.245,108.393 94.245,105.289 94.8,104.734 v1(94.8,103.5)
  Bottom Layer w0.2: J16.29@76.54,119.2 77.5,119.2 78.55,120.25 79.515,120.25 80.2,119.565 80.2,119.115 81.165,118.15 81.185,118.15 81.835,117.5 87.127,117.5 87.427,117.8 88.173,117.8 88.222,117.75 93.65,117.75 v1(94.2,117.2) ; v1(78.4,88.4) 78.5,88.4 81.5,91.4 v1(85.9,91.4) ; v1(87.4,103.5) 87.6,103.5 88.5,104.4 91.875,104.4 92.365,103.91 94.39,103.91 v1(94.8,103.5)
PB13: J16.31 MCU.87 R12.1 | length 79.3
  Top Layer w0.2: R12.1@33.6,116.3 33.6,115.3 33.8,115.1 34.5,115.1 35.4,116 v1(35.6,116) ; J16.31@79.06,119.2 78.01,118.15 78.01,112.705 79.79,110.925 79.79,102.406 80.9,101.296 80.9,91.425 MCU.87@79.733,90.258
  Bottom Layer w0.2: v1(35.6,116) 38.675,116 39.365,116.69 57.29,116.69 57.7,117.1 76.98,117.1 J16.31@79.08,119.2
PB14: J14.25 MCU.140 R133.1 | length 143.6
  Top Layer w0.2: v1(38.9,51.7) 38.975,51.775 38.975,84.175 v1(39.2,84.4) ; MCU.140@58.732,86.722 60.354,85.1 62.8,85.1 63,84.9 v1@63.2,84.9 ; v1@114.05,51.95 R133.1@114.05,53.2
  Bottom Layer w0.2: v1@38.8,51.6 v1(38.9,51.7) 39,51.6 62.727,51.6 63.473,51.6 65.838,51.6 66.438,52.2 96.562,52.2 96.662,52.1 97.738,52.1 98.4,52.762 112.938,52.762 v1(114,51.7) 117.17,51.7 J14.25@117.25,51.78 ; v1(39.2,84.4) 39.4,84.6 60.966,84.6 61.466,85.1 63.3,85.1 63.2,85.2 v1(63,85.2)
PB15: J16.35 MCU.76 R137.1 | length 142
  Top Layer w0.2: MCU.76@83.622,86.369 84.5,87.247 84.5,111.5 85.23,112.23 85.23,117.861 J16.35@84.311,118.78 ; R137.1@105.35,64 105.4,64 109,67.6 111.749,67.6 112.05,67.901 112.05,77.59 111.4,78.24 111.4,78.264 111.193,78.472 111.193,88.8 109.993,90 v1(109.4,90) ; v1(108.8,121) 108.8,122.1 109.6,122.9 114,122.9 118.4,118.5 v1@118.4,90.4
  Bottom Layer w0.2: J16.35@84.16,119.2 85.085,119.2 86.135,120.25 92.277,120.25 93.827,118.7 106.573,118.7 108.8,120.927 v1(108.8,121) ; v1(109.4,90) v1(118.4,90)
PB16: J16.6 MCU.77 | length 73.9
  Top Layer w0.2: J16.6@46.04,121.74 47.13,120.65 47.13,112.665 46.9,112.435 46.9,97.69 47.55,97.04 47.55,92.859 46.9,92.209 46.9,88.627 48.2,87.327 v1(48.2,87) ; v1(80.2,87) 80.654,87 80.8,86.854 80.746,86.8 81.746,85.8 82.346,85.8 MCU.77@83.268,86.722
  Bottom Layer w0.2: v1(48.2,87) 48.6,87.4 67.827,87.4 68.927,86.3 69.673,86.3 70.3,86.927 70.3,86.973 70.827,87.5 71.573,87.5 71.873,87.2 77.173,87.2 77.273,87.3 79.9,87.3 v1(80.2,87)
PB17: J16.8 MCU.88 | length 66.7
  Top Layer w0.2: v1(47.8,89) 47.95,89.15 47.95,97.206 47.3,97.856 47.3,112.269 47.53,112.499 47.53,120.55 J16.8@48.72,121.74 ; v1(76.8,88.1) 79.311,90.611 MCU.88@79.379,90.611
  Bottom Layer w0.2: v1(47.8,89) 48.5,88.3 49.7,88.3 75.127,88.3 75.327,88.1 v1(76.8,88.1)
PB18: J16.10 MCU.89 | length 65.1
  Top Layer w0.2: v1(49.8,89.2) 50.7,90.1 50.7,96.785 50.076,97.409 50.076,98.779 50,98.855 50,100.382 49.855,100.527 49.855,102.66 50.076,102.881 50.076,104.159 51.181,105.264 51.181,111.594 50.07,112.705 50.07,120.67 J16.10@51.14,121.74 ; v1(75.7,89) 77.061,89 MCU.89@79.026,90.965
  Bottom Layer w0.2: v1(49.8,89.2) 50.3,88.7 75.4,88.7 v1(75.7,89)
PB19: J15.11 MCU.90 | length 26.8
  Top Layer w0.2: J15.11@76.56,115.64 77.61,114.59 77.61,112.539 79.39,110.759 79.39,102.24 80.5,101.13 80.5,93.146 MCU.90@78.672,91.319 MCU.90@78.672,91.389
PB20: J16.14 MCU.91 R126.1 | length 90.7
  Top Layer w0.2: v1(54.1,104.8) 54.1,104.62 53.89,104.41 53.89,109.59 54.75,110.45 54.75,120.27 J16.14@56.22,121.74 ; MCU.91@78.319,91.672 80.1,93.454 80.1,100.964 78.5,102.565 78.5,103.9 v1(78.4,104) ; v1@93.187,99.813 93.187,94.601 93.383,94.405 94.117,94.405 95.199,93.323 95.199,91.025 95.881,90.343 R126.1@95.881,84.78
  Bottom Layer w0.2: v1@53.89,104.8 v1(54.1,104.8) 54.7,104.2 74.227,104.2 75.027,103.4 75.773,103.4 76.373,104 v1(78.4,104) 78.7,104 82.3,100.4 92.4,100.4 v1(92.9,99.9)
PB21: J16.16 MCU.92 R125.1 R129.2 | length 93.3
  Top Layer w0.2: J16.16@58.76,121.74 58.76,120.685 59.83,119.615 59.83,115.205 60.27,114.765 60.27,103.73 v1(60.7,103.3) ; MCU.92@77.965,92.026 79.7,93.761 79.7,100.7 v1(77.6,102.8) ; v1(104,98.5) 105.2,97.3 R129.2@105.2,86.5 ; R129.2@104.881,86.78 105,86.661 R125.1@105,83.75 ; v1(77.6,102.8) 77.4,103 v1(77.6,102.8)
  Bottom Layer w0.2: v1@60.7,103.073 v1(60.7,103.3) 72.773,103.3 74.561,103.3 75.061,102.8 v1(77.6,102.8) 78.1,102.3 79.134,102.3 81.434,100 91.5,100 93,98.5 v1(104,98.5)
PB22: J16.18 MCU.141 | length 81.6
  Top Layer w0.2: v1(35.2,121.2) 36.1,122.1 38.7,122.1 39.7,121.1 39.7,112.915 40.6,112.015 v1@40.6,103.2 ; v1(54.4,100.8) 54.4,96.475 54.15,96.225 54.15,90.597 MCU.141@58.378,86.369
  Bottom Layer w0.2: v1(35.2,121.2) 36.79,122.79 60.25,122.79 J16.18@61.3,121.74 ; v1(40.6,102.7) 41.307,102.7 42.007,102 50.927,102 52.127,100.8 v1(54.4,100.8)
PB23: BP4.3 BP4.4 J19.22 MCU.142 | length 85.9
  Top Layer w0.2: v1(46.8,65.9) 47.325,66.325 47.325,68.621 48.4,69.696 48.4,71.127 47.3,72.227 47.3,74.461 48.4,75.561 v1(48.4,82.4) ; v1@55.4,82.5 57.122,84.222 58.14,84.222 58.757,84.839 58.757,85.212 57.989,85.98 MCU.142@58.025,86.015 ; v1(64.3,66.532) 64,66.232 64,65.525 64,52.062 65.25,50.812 65.25,43.849 BP4.4@65.081,43.68 BP4.3@65.081,35.73 65.081,33.12 J19.22@65.681,32.52
  Bottom Layer w0.2: v1(46.8,65.9) 47.3,65.4 54.427,65.4 55.627,64.2 56.373,64.2 56.873,64.7 60.927,64.7 61.527,64.1 62.273,64.1 62.8,64.627 62.8,65.032 v1(64.3,66.532) ; v1(48.4,82.4) 55.3,82.4 v1(55.4,82.3)